# Allegro board JN5168-001-MXX-CarrierBoard.brd
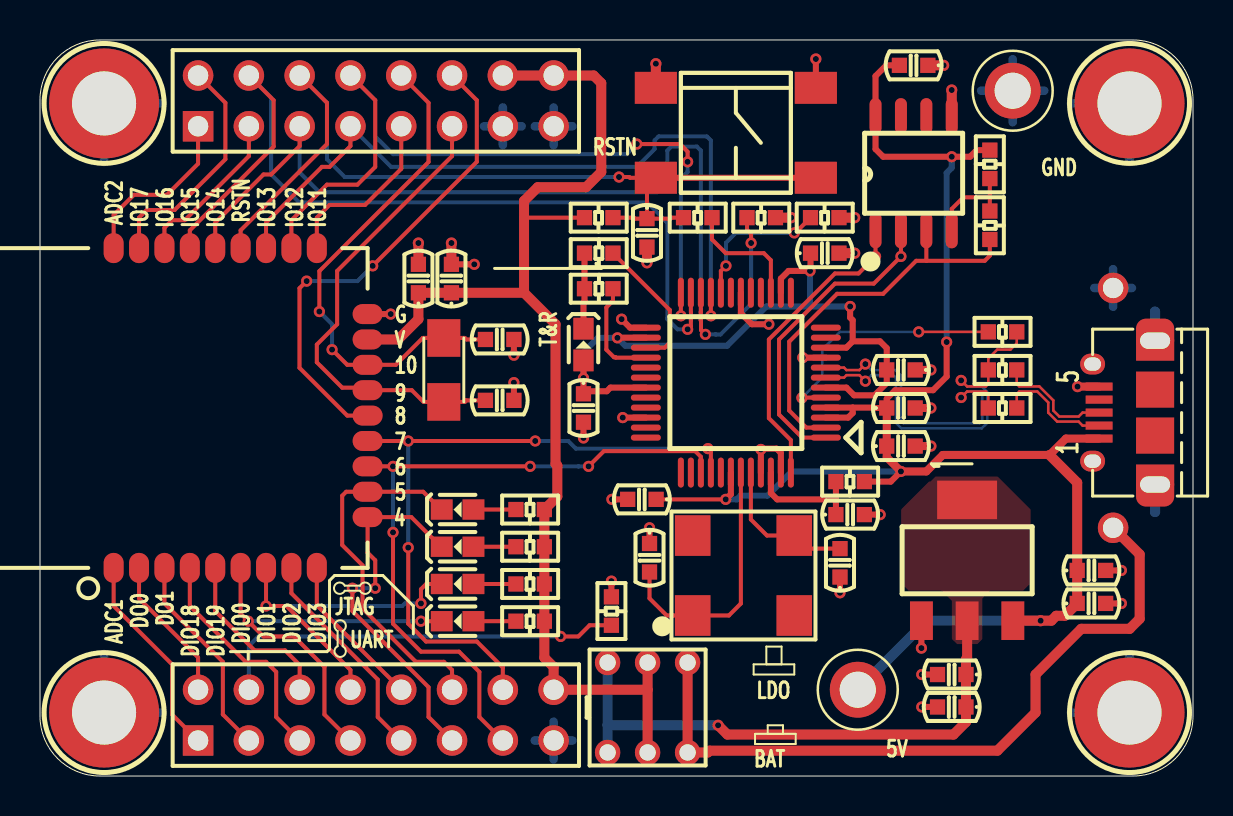
[diagram p0: board, top side]
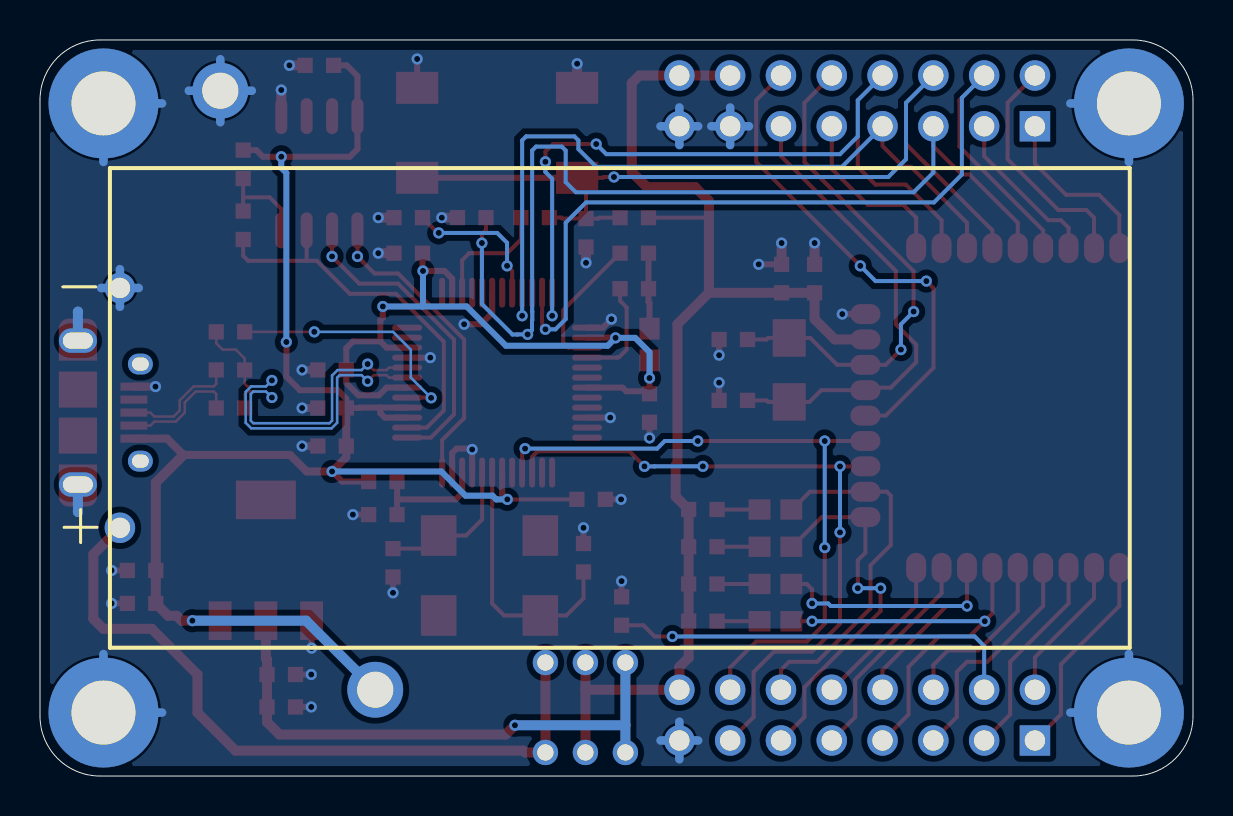
[diagram p1: board, bottom side, seen from below]

Outline 57.66 x 36.83 mm; copper layers: TOP, BOTTOM. Coordinates in mm from the lower left corner of the outline.
Outline path: 0,33.83 arc(0.88,35.95) 3,36.83 54.66,36.83 arc(56.78,35.95) 57.66,33.83 57.66,3 arc(56.78,0.88) 54.66,0 3,0 arc(0.88,0.88) 0,3 0,33.83

## Design rules (mm)
constraint set DEFAULT: min track width 0.127, pair gap 0.127
net group USB_DIFF1: nets N10452 N10456
net group USB_DIP: nets DM DP

## Placement (name value [footprint] x y rotation side)
C1  226  [C0603]  52.58 10.29 0 top
C2  226  [C0603]  43.05 18.41 0 top
C3  104  [C0603]  52.58 8.64 0 top
C4  226  [C0603]  45.59 5.08 180 top
C5  226  [C0603]  20.57 24.89 90 top
C6  104  [C0603]  45.59 3.46 180 top
C7  471  [C0603]  30.35 27.18 270 top
C8  104  [C0603]  27.18 18.41 270 top
C9  120  [C0603]  22.99 18.8 0 top
C10  104  [C0603]  43.05 16.51 0 top
C11  104  [C0603]  30.1 13.84 180 top
C12  104  [C0603]  39.24 26.16 0 top
C13  120  [C0603]  22.99 21.84 0 top
C14  104  [C0603]  43.05 20.32 180 top
C15  104  [C0603]  40.51 13.08 0 top
C16  104  [C0603]  43.69 35.56 180 top
C17  270  [C0603]  30.48 10.92 270 top
C18  270  [C0603]  40 10.67 90 top
C19  104  [C0603]  18.92 24.89 90 top
G1  32.768KHz  [OSC_SMD_3215]  20.19 20.32 270 top
G2  6MHz  [OSC_SMD_7050_4P]  35.18 10.03 90 top
H1  HOLE  [HOLE3R0]  3.21 33.66 0 top
H2  HOLE  [HOLE3R0]  3.21 3.18 0 top
H3  HOLE  [HOLE3R0]  54.48 33.66 0 top
H4  HOLE  [HOLE3R0]  54.48 3.18 0 top
J1  CON_2x8_2r54  [CON2X8_2R54_DIP]  16.79 3.05 90 top
J2  CON_2x8_2r54  [CON2X8_2R54_DIP]  16.79 33.78 90 top
J3  BAT  [BAT_AAAX2_51X24X12]  28.66 18.42 180 bottom
J4  -  [ZX62D_B_5P8]  53.09 18.19 90 top
NOREF  -  []  0 23.49 0 top
NOREF#2  -  []  55.76 14.58 90 top
NOREF#3  -  []  34.88 0 90 top
R1  103  [R0603]  24.51 7.75 180 top
R2  103  [R0603]  24.51 9.61 180 top
R3  103  [R0603]  24.51 11.47 180 top
R4  103  [R0603]  24.51 13.34 180 top
R5  270  [R0603]  48.13 18.41 180 top
R6  103  [R0603]  27.94 27.94 180 top
R7  270  [R0603]  48.13 20.32 180 top
R10  103  [R0603]  36.07 27.94 180 top
R11  103  [R0603]  39.24 27.94 180 top
R12  270  [R0603]  32.89 27.94 180 top
R13  471  [R0603]  40.51 14.73 180 top
R16  152  [R0603]  48.13 22.22 180 top
R17  222  [R0603]  47.5 27.56 270 top
R18  103  [R0603]  47.5 30.61 90 top
R19  103  [R0603]  27.94 24.38 0 top
R20  103  [R0603]  27.94 26.16 0 top
R21  103  [R0603]  28.57 8.25 270 top
SW1  RESET_SW  [B3FS_6X6X4R3]  34.8 32.19 0 top
SW2  5.8x5.8_DPDT  [DPDT_5R8X5R8]  30.38 3.43 270 top
TP1  GND  [TP_1R8]  48.64 34.29 0 top
TP2  GND  [TP_1R8]  40.89 4.32 0 top
U1  -  [JN5168-001-M00]  3.68 10.41 90 top
U2  AMS1117-3.3  [SOT223-2]  46.36 10.8 0 top
U3  FT2232D  [LQFP48_0R5_9X9]  34.8 19.69 90 top
U4  93C66A  [SO8N_6R0_1R27]  41.78 27.31 90 top
V1  RED  [V0603]  20.88 7.75 0 top
V2  RED  [V0603]  20.88 9.61 0 top
V3  RED  [V0603]  20.88 11.47 0 top
V4  RED  [V0603]  20.88 13.34 0 top
V5  RED  [V0603]  27.18 21.59 270 top

## Library data of the parts
C1-C13 C15 C19 = CAP_NP
C14 C16-C18 = CAP NP
G1 = G_OSC_2PIN
G2 = G_OSC_4PINpassive
H1-H4 = HOLE
J1 J2 = CON16AP_1
J3 = XS_CON2
J4 = Xs_MICRO_USB_0
R1-R7 R12 R21 = R2
R10 R11 R13 R16-R20 = R
SW1 = S_PUSHBUTTON-SPST-4PIN
SW2 = S_DPDT
TP1 TP2 = TP_TEST-POINT
U1 = D_JN5168-001-MXX
U2 = N_PWR_ADP3338AKC: User Part Number: UPN; Tolerance: TOL
U3 = FT2232D_1
U4 = 93C66_0
V1-V5 = V_LED

## Footprints (pads in the part's own frame, mm; a bottom-side part is the same pattern mirrored in y, then rotated)
B3FS_6X6X4R3
  rect 2.108x1.6 smd: 1(-4,-2.25) 2(4,-2.25) 3(-4,2.25) 4(4,2.25)
BAT_AAAX2_51X24X12
  round 1.524 hole 1.016: 1(-25,6) 2(-25,-6)
C0603
  rect 0.762x0.762 smd: 1(-0.711,0) 2(0.711,0)
CON2X8_2R54_DIP
  rect 1.524x1.524 hole 1.016: 1(-1.27,8.89)
  round 1.524 hole 1.016: 2(-1.27,6.35) 3(-1.27,3.81) 4(-1.27,1.27) 5(-1.27,-1.27) 6(-1.27,-3.81) 7(-1.27,-6.35) 8(-1.27,-8.89) 9(1.27,-8.89) 10(1.27,-6.35) 11(1.27,-3.81) 12(1.27,-1.27) 13(1.27,1.27) 14(1.27,3.81) 15(1.27,6.35) 16(1.27,8.89)
DPDT_5R8X5R8
  round 1.27 hole 0.813: 1(-2.25,2) 2(-2.25,0) 3(-2.25,-2) 4(2.25,-2) 5(2.25,0) 6(2.25,2)
HOLE3R0
  round 5.5 hole 3.2: 1(0,0)
JN5168-001-M00
  oval 1.5x1 smd: 1(0,0) 2(0,-1.27) 3(0,-2.54) 4(0,-3.81) 5(0,-5.08) 6(0,-6.35) 7(0,-7.62) 8(0,-8.89) 9(0,-10.16) 19(16,-10.16) 20(16,-8.89) 21(16,-7.62) 22(16,-6.35) 23(16,-5.08) 24(16,-3.81) 25(16,-2.54) 26(16,-1.27) 27(16,0)
  oval 1x1.5 smd: 10(2.54,-12.7) 11(3.81,-12.7) 12(5.08,-12.7) 13(6.35,-12.7) 14(7.62,-12.7) 15(8.89,-12.7) 16(10.16,-12.7) 17(11.43,-12.7) 18(12.7,-12.7)
LQFP48_0R5_9X9
  oval 0.3x1.5 smd: 1(-2.75,-4.5) 2(-2.25,-4.5) 3(-1.75,-4.5) 4(-1.25,-4.5) 5(-0.75,-4.5) 6(-0.25,-4.5) 7(0.25,-4.5) 8(0.75,-4.5) 9(1.25,-4.5) 10(1.75,-4.5) 11(2.25,-4.5) 12(2.75,-4.5) 25(2.75,4.5) 26(2.25,4.5) 27(1.75,4.5) 28(1.25,4.5) 29(0.75,4.5) 30(0.25,4.5) 31(-0.25,4.5) 32(-0.75,4.5) 33(-1.25,4.5) 34(-1.75,4.5) 35(-2.25,4.5) 36(-2.75,4.5)
  oval 1.5x0.3 smd: 13(4.5,-2.75) 14(4.5,-2.25) 15(4.5,-1.75) 16(4.5,-1.25) 17(4.5,-0.75) 18(4.5,-0.25) 19(4.5,0.25) 20(4.5,0.75) 21(4.5,1.25) 22(4.5,1.75) 23(4.5,2.25) 24(4.5,2.75) 37(-4.5,2.75) 38(-4.5,2.25) 39(-4.5,1.75) 40(-4.5,1.25) 41(-4.5,0.75) 42(-4.5,0.25) 43(-4.5,-0.25) 44(-4.5,-0.75) 45(-4.5,-1.25) 46(-4.5,-1.75) 47(-4.5,-2.25) 48(-4.5,-2.75)
OSC_SMD_3215
  rect 1.88x1.651 smd: 1(-1.6,0) 2(1.6,0)
OSC_SMD_7050_4P
  rect 2.032x1.778 smd: 1(-2,2.54) 2(-2,-2.54) 3(2,-2.54) 4(2,2.54)
R0603
  rect 0.762x0.762 smd: 1(-0.711,0) 2(0.711,0)
SO8N_6R0_1R27
  oval 1.8x0.6 smd: 1(0,0) 2(0,-1.27) 3(0,-2.54) 4(0,-3.81) 5(5.715,-3.81) 6(5.715,-2.54) 7(5.715,-1.27) 8(5.715,0)
SOT223-2
  rect 1.143x1.93 smd: 1(-2.286,-3.023) 2(0,-3.023) 3(2.286,-3.023)
  rect 2.997x1.93 smd: PAD(0,3.023)
TP_1R8
  round 2.794 hole 1.803: 1(0,0)
V0603
  rect 1.092x1.016 smd: 1(-0.794,0) 2(0.794,0)
ZX62D_B_5P8
  rect 0.406x1.346 smd: 1(-1.3,0.123) 2(-0.65,0.123) 3(0,0.123) 4(0.65,0.123) 5(1.3,0.123)
  oval 1.219x1.905 hole 0.813x1.499: 6(3.6,-2.677) 9(-3.6,-2.677)
  rect 1.803x1.905 smd: 7(1.15,-2.677) 8(-1.15,-2.677)
  oval 1.041x1.245 hole 0.66x0.838: 10(2.428,0.448) 11(-2.428,0.448)

## Nets
AVCC_5V: C15.1 R13.2 U3.46
GND: C1.2 C2.2 C3.2 C4.2 C5.2 C6.2 C7.2 C8.2 C9.2 C10.2 C11.2 C12.2 C13.2 C14.1 C15.2 C16.1 C17.1 C18.1 C19.2 H1.1 H2.1 H3.1 H4.1 J1.8 J2.7 J2.8 J3.1 J4.5 J4.6 J4.9 R10.1 R11.1 R21.1 SW1.3 SW1.4 TP1.1(TP) U1.18 U2.1 U3.9 U3.18 U3.25 U3.34 U3.45 U3.47 U4.5
VCC_3V3: C5.1 C19.1 J1.9 J2.9 J2.10 R1.1 R2.1 R3.1 R4.1 R6.2 SW2.2 SW2.5 U1.17
VCC_5V: C1.1 C2.1 C3.1 C10.1 C11.1 C16.2 J4.1(VBUS) R13.1 R18.2 TP2.1(TP) U2.3 U3.3 U3.4 U3.42 U4.8(VCC)
VCCIO_3V3: C8.1 C12.1 C14.2 U3.6 U3.10 U3.14 U3.26 U3.31 V5.2
ACBUS0: R12.1 U3.15
ADC1: J1.1 U1.1
ADC2: J2.1 U1.27(VREF/ADC2)
BAT_VCC: J3.2 SW2.1 SW2.6
DIO2: J1.5 U1.8
DIO3: J1.12 U1.9
DIO8: J2.11 U1.14
DIO9: C9.1 G1.2 J2.6 U1.15
DIO10: C13.1 G1.1 J2.12 U1.16
DIO11: J2.5 U1.19
DIO16: J2.2 U1.25
DIO17: J2.16 U1.26
DIO18: J1.3 U1.4
DIO19: J1.14 U1.5
DM: R5.2 U3.8
DO0: J1.16 U1.2
DO1: J1.2 U1.3
DP: R7.2 R16.1 U3.7
EECS: U3.48 U4.1
EEIO: R17.2 U3.2 U4.3
EESK: U3.1 U4.2
JTAG_TCK: J2.13 U1.20 U3.24
JTAG_TDI: J2.15 U1.24 U3.23
JTAG_TDO: J2.3 R10.2 U1.23 U3.22
JTAG_TMS: J2.4 U1.21 U3.21
LDO_3V3: C4.1 C6.1 SW2.3 SW2.4 U2.2 U2.PAD(OUT2)
LED1: J1.4 U1.6 V1.1
LED2: J1.13 U1.7 V2.1
LED3: J1.6 U1.10 V3.1
LED4: J1.11 U1.11 V4.1
RESETN: C7.1 J2.14 R6.1 R12.2 SW1.1 SW1.2 U1.22
RXD0: J1.10 U1.13 U3.40
TXD0: J1.7 U1.12 U3.39
N00555: R1.2 V1.2
N00717: R2.2 V2.2
N00810: R3.2 V3.2
N00904: R4.2 V4.2
N10452: J4.3 R7.1
N10456: J4.2 R5.1
N16704285: R11.2 U3.20
N16704295: R19.1 R20.1 V5.1
N16704491: C17.2 G2.1 U3.43
N16704511: C18.2 G2.3 U3.44(XTOUT)
N16704687: R16.2 U3.5
N16704769: R19.2 U3.28
N16704773: R20.2 U3.27
N16706568: R17.1 R18.1 U4.4
N16780926: J1.15 R21.2

Pads without a net: G2 2 4; J4 4 7 8 10 11; U3 11 12 13 16 17 19 29 30 32 33 35 36 37 38 41; U4 6 7

## Via types
v1: diameter 0.559, hole 0.305, TOP to BOTTOM, 81 vias

## Routing (per net, layer and track width the routed paths; a pad name or vN(x,y) marks a point on that pad's centre or on a via; arc(x,y) is an arc through that point)
AVCC_5V: length 6.1
  TOP w0.3: U3.46 36.55,14.16 36.86,13.84 39.7,13.84 39.8,13.74 ; 39.8,13.74 39.8,13.74 C15.1 ; 39.8,13.74 R13.2
GND: length 83.9
  TOP w0.3: C5.2 v1(21.72,25.6) ; C6.2 v1(44.09,3.46) ; U3.9 v1(38.14,20.93) ; C18.1 v1(40,9.17) ; v1(29.08,22.86) 29.51,22.44 U3.25 ; SW1.4 v1(38.8,35.88) ; C4.2 v1(44.09,5.08) ; U3.34 v1(29.14,17.93) ; C15.2 v1(42.01,13.08) ; C9.2 v1(23.7,19.69) ; C17.1 v1(30.48,12.42) ; C8.2 v1(27.18,16.92) ; U1.18 v1(17.54,23.12) ; U3.47 37.05,16.17 36.83,16.38 36.09,16.38 v1(36.05,16.34) U3.45 ; C3.2 v1(54.08,8.64) ; C13.2 v1(23.7,21.06) ; U3.18 35.05,23.16 35.6,22.61 v1(36.45,22.61) ; C11.2 v1(28.6,13.84) ; R21.1 v1(28.57,9.75) ; U2.1 v1(44.08,6.4) ; C1.2 v1(54.08,10.29)
  TOP w0.4: C2.2 v1(44.55,18.41) ; J4.5 v1(51.88,19.49) ; C10.2 v1(44.55,16.51) ; C14.1 v1(44.55,20.32)
  TOP w0.5: C16.1 v1(45.19,35.56) ; SW1.3 v1(30.8,35.64) ; C12.2 v1(40.74,26.16) ; U4.5 v1(45.59,34.33) ; C7.2 v1(30.35,25.68) ; C5.2 v1(20.57,26.67) ; R11.1 v1(40.74,27.94) ; R10.1 v1(37.57,27.94) ; C19.2 v1(18.92,26.67)
  BOTTOM w0.427: 25.69,0.84 J1.8 ; J1.8 26.62,1.78 ; J1.8 24.75,1.78 ; J1.8 25.69,2.72 ; TP1.1 50.22,34.29 ; TP1.1 48.64,35.87 ; TP1.1 47.07,34.29 ; TP1.1 48.64,32.72 ; J2.8 26.62,32.51 ; J2.8 24.75,32.51 ; J2.8 25.69,31.57 ; J2.8 25.69,33.45 ; J3.1 53.66,25.36 ; J3.1 54.6,24.42 ; J3.1 53.66,23.48 ; J3.1 52.72,24.42 ; 6.13,33.66 H1.1 3.21,30.73 ; 51.56,3.18 H4.1 54.48,6.1 ; 23.15,31.57 J2.7 ; J2.7 23.15,33.45 ; J2.7 22.21,32.51 ; J2.7 24.09,32.51 ; 54.48,30.73 H3.1 51.56,33.66 ; 6.13,3.18 H2.1 3.21,6.1
  BOTTOM w0.5: 55.75,13.21 55.76,13.22 J4.9 ; J4.6 55.76,23.23 55.75,23.24
VCC_3V3: length 61.4
  TOP w0.2: R6.2 24.21,27.94
  TOP w0.5: SW2.2 30.38,4.32 ; 30.38,4.32 SW2.5 ; 30.38,4.32 J1.9 25.69,5.46 25.22,5.92 R1.1 R2.1 R3.1 R4.1 25.87,13.98 25.87,15.53 25.78,15.62 25.78,22.61 24.21,24.18 ; 23.15,35.05 27.69,35.05 28.07,34.67 28.07,30.23 27.31,29.46 24.89,29.46 24.21,28.78 24.21,24.18 ; 24.21,24.18 C5.1 C19.1 18.92,22.86 17.91,21.84 U1.17
VCC_5V: length 83.4
  TOP w0.2: C11.1 v1(34.29,13.84)
  TOP w0.3: C16.2 42.32,35.56 41.78,35.02 U4.8 41.78,31.37 42.16,30.99 v1(45.59,30.99) 46.51,30.99 46.84,31.32 R18.2 ; 40.64,18.44 41.66,18.44 41.68,18.41 C2.1 42.34,18.88 42.76,19.3 44.66,19.3 45.34,19.99 v1(45.34,21.72) ; 40.64,18.44 40.64,18.16 40.41,17.93 U3.3 ; 40.64,18.44 U3.4 ; v1(34.29,13.84) 34.55,14.1 U3.42 ; v1(43.05,15.24) 42.54,14.73 41.22,14.73
  TOP w0.4: C2.1 C10.1 42.34,15.95 v1(43.05,15.24) 44.32,15.24 45.15,16.07 50.48,16.07 51.3,16.88 J4.1
  TOP w0.5: 50.48,16.07 51.87,14.68 C1.1 C3.1 51.25,8.02 50.82,8.02 50.57,7.77 v1(50.04,7.77) U2.3
  BOTTOM w0.3: v1(34.29,13.84) 34.85,13.84 35.03,14.03 36.38,14.03 37.59,15.24 v1(43.05,15.24) ; v1(45.59,30.99) 45.59,30.43 45.34,30.18 v1(45.34,21.72)
  BOTTOM w0.5: TP2.1 44.35,7.77 v1(50.04,7.77)
VCCIO_3V3: length 37.6
  TOP w0.3: U3.10 40.33,21.44 40.64,21.75 ; U3.26 28.89,21.93 v1(28.88,21.92) ; v1(40.51,23.5) 40.51,22.94 40.64,22.81 40.64,21.75 ; 40.64,21.75 42,21.75 42.34,21.41 C14.2 42.34,19.66 41.73,19.05 40.71,19.05 40.33,19.44 U3.6 ; V5.2 v1(27.18,19.91) C8.1 27.31,19.25 28.34,19.25 28.53,19.44 U3.31 ; C12.1 38.53,25.3 v1(38.51,25.27) 37.43,25.27 37.05,24.89 U3.14
  BOTTOM w0.3: v1(38.51,25.27) 38.51,23.53 38.54,23.5 ; 38.54,23.5 v1(40.51,23.5) ; 38.54,23.5 36.32,23.5 34.36,21.53 29.27,21.53 v1(28.88,21.92) 27.89,21.92 27.18,21.21 v1(27.18,19.91)
ACBUS0: length 6.1
  TOP w0.2: R12.1 33.6,26.85 34.29,26.16 36.19,26.16 36.55,25.81 U3.15
ADC1: length 10.4
  TOP w0.2: J1.1 6.6,3.08 6.6,5.59 3.68,8.51 U1.1
ADC2: length 8.8
  TOP w0.2: U1.27 3.68,28.07 4.7,29.08 6.35,29.08 7.91,30.64 J2.1
BAT_VCC: length 36.1
  TOP w0.5: J3.2 54.99,11.09 54.99,7.87 54.49,7.37 52.07,7.37 49.78,5.08 49.78,3.18 47.88,1.27 33.49,1.27 33.4,1.18 SW2.6 SW2.1
DIO2: length 10.9
  TOP w0.2: U1.8 12.57,9.14 16.89,4.83 16.89,2.95 J1.5
DIO3: length 7.8
  TOP w0.2: J1.12 13.84,8.54 U1.9
DIO8: length 24.7
  TOP w0.2: 20.6,35.05 21.84,33.81 21.84,30.73 v1(16.64,25.53) ; v1(13.34,24.77) 12.98,24.41 12.98,20.42 15.37,18.03 U1.14
  BOTTOM w0.2: v1(16.64,25.53) 15.88,24.77 v1(13.34,24.77)
DIO9: length 23.9
  TOP w0.2: C9.1 21.32,18.8 21.25,18.72 G1.2 19.18,18.72 18.59,19.31 U1.15 16.26,19.43 15.11,19.43 13.84,20.7 13.84,21.59 14.86,22.61 14.86,25.27 20.6,31.02 J2.6
DIO10: length 25.4
  TOP w0.2: 18.06,35.05 19.43,33.69 19.43,30.72 13.97,25.26 v1(13.97,23.24) ; v1(14.6,21.34) 15.37,20.57 U1.16 17.8,20.57 19.14,21.92 G1.1 21.25,21.92 21.32,21.84 C13.1
  BOTTOM w0.2: v1(13.97,23.24) 14.6,22.61 v1(14.6,21.34)
DIO11: length 8.9
  TOP w0.2: U1.19 13.84,27.94 14.48,28.57 16.26,28.57 18.06,30.38 J2.5
DIO16: length 8.2
  TOP w0.2: J2.2 10.44,31.02 7.24,27.81 6.6,27.81 6.22,27.43 U1.25
DIO17: length 11.8
  TOP w0.2: 7.91,35.05 9.27,33.69 9.27,30.86 6.73,28.32 5.33,28.32 4.95,27.94 U1.26
DIO18: length 11.5
  TOP w0.2: J1.3 11.81,2.95 11.81,5.21 11.3,5.72 10.29,5.72 7.49,8.51 U1.4
DIO19: length 8.7
  TOP w0.2: J1.14 12.99,5.56 12.26,6.29 10.73,6.29 8.76,8.25 U1.5
DM: length 15.4
  TOP w0.127: v1(46.06,18.94) 46.36,19.24 47.29,19.24 47.42,19.11 R5.2 ; U3.8 40.21,20.44 40.33,20.31 40.97,20.31 v1(41.28,20.61)
  BOTTOM w0.127: v1(41.28,20.61) 41.58,20.31 42.78,20.31 43.05,20.04 43.05,17.78 43.18,17.65 46.99,17.65 47.12,17.78 47.12,19.11 46.99,19.24 46.36,19.24 v1(46.06,18.94)
DO0: length 7.3
  TOP w0.2: U1.2 4.95,8.89 7.91,5.94 J1.16
DO1: length 10.4
  TOP w0.2: U1.3 6.22,8.64 9.14,5.72 9.14,3.08 J1.2
DP: length 19.1
  TOP w0.127: U3.7 40.21,19.93 40.33,20.06 40.97,20.06 v1(41.28,19.76) ; v1(46.06,19.8) 46.36,19.49 47.29,19.49 47.42,19.62 R7.2 47.42,20.89 47.87,21.34 48.53,21.34 48.84,21.65 48.84,22.22
  BOTTOM w0.127: v1(41.28,19.76) 41.58,20.06 42.67,20.06 42.8,19.93 42.8,17.67 43.07,17.4 47.1,17.4 47.37,17.67 47.37,19.22 47.1,19.49 46.36,19.49 v1(46.06,19.8)
EECS: length 15.5
  TOP w0.2: U4.1 v1(41.78,26) 40.93,25.15 39.75,25.15 36.45,21.84 36.45,17.91 37.55,16.81 U3.48
EEIO: length 19.8
  TOP w0.2: 44.32,25.78 U4.3 ; 44.32,25.78 47.24,25.78 47.5,26.03 R17.2 ; 44.32,25.78 43.81,25.78 42.16,24.13 39.86,24.13 37.47,21.74 37.47,18.29 38.32,17.44 U3.2
EESK: length 15.7
  TOP w0.2: U3.1 38.11,16.93 36.96,18.09 36.96,21.84 39.75,24.64 41.69,24.64 v1(43.05,26) U4.2
JTAG_TCK: length 41.2
  TOP w0.2: 15.53,35.05 16.76,33.81 16.76,30.48 15.88,29.59 14.35,29.59 12.57,27.81 U1.20 ; v1(32.38,30.73) 32.38,31.24 32,31.62 v1(29.84,31.62) ; U3.24 v1(32.05,23.03)
  BOTTOM w0.2: v1(29.84,31.62) 29.34,31.12 17.65,31.12 16.76,32 16.76,33.81 15.53,35.05 ; v1(32.38,30.73) 32.38,30.23 32.05,29.89 v1(32.05,23.03)
JTAG_TDI: length 45.1
  TOP w0.2: U3.23 32.55,23.21 32.55,23.2 32.55,22.82 32.55,22.81 32.55,22.52 v1(32.38,22.35) ; U1.24 7.49,27.31 11.68,31.5 11.68,33.81 10.44,35.05
  BOTTOM w0.2: v1(32.38,22.35) 31.88,22.35 31.37,22.86 31.37,27.69 30.35,28.7 12.95,28.7 11.56,30.1 11.56,33.94 10.44,35.05
JTAG_TDO: length 51.6
  TOP w0.2: R10.2 35.36,27.33 35.56,27.13 v1(35.56,26.67) ; J2.3 12.99,31.52 11.56,30.1 11.18,30.1 8.76,27.69 U1.23 ; v1(33.27,22.1) 33.05,22.32 33.05,22.77 33.05,22.78 33.05,22.81 33.04,22.82 33.04,23.2 33.05,23.21 U3.22
  BOTTOM w0.2: J2.3 12.99,30.19 13.97,29.21 30.86,29.21 31.37,29.72 31.37,31.3 31.57,31.5 32.85,31.5 33.05,31.3 33.05,23.24 33.04,23.24 33.04,22.82 33.05,22.81 33.05,22.32 v1(33.27,22.1) 33.78,22.1 33.79,22.09 34.03,22.09 35.56,23.62 v1(35.56,26.67)
JTAG_TMS: length 37.8
  TOP w0.2: U1.21 11.3,27.69 14.1,30.48 14.48,30.48 15.53,31.52 J2.4 ; U3.21 v1(33.55,23.03)
  BOTTOM w0.2: v1(33.55,23.03) 33.55,31.8 33.35,32 30.93,32 30.73,31.8 30.73,31.37 29.84,30.48 17.56,30.48 J2.4
LDO_3V3: length 28
  TOP w0.5: U2.2 46.36,5.9 46.3,5.84 C4.1 C6.1 46.3,2.7 45.68,2.08 34.37,2.08 v1(33.91,2.54)
  BOTTOM w0.5: SW2.3 28.38,2.54 ; 28.38,2.54 SW2.4 ; 28.38,2.54 v1(33.91,2.54)
LED1: length 21.5
  TOP w0.2: U1.6 10.03,8.13 v1(10.41,7.75) 11.18,6.99 12.7,6.99 14.22,5.46 14.22,3.08 J1.4 ; V1.1 v1(19.05,7.75)
  BOTTOM w0.2: v1(19.05,7.75) v1(10.41,7.75)
LED2: length 18.1
  TOP w0.2: J1.13 15.53,5.31 12.32,8.51 v1(11.3,8.51) U1.7 ; v1(19.05,8.64) 19.05,9.34 19.32,9.61 V2.1
  BOTTOM w0.2: v1(11.3,8.51) 18.12,8.51 18.25,8.64 v1(19.05,8.64)
LED3: length 18.9
  TOP w0.2: v1(15.62,9.4) 15.62,8.25 19.43,4.44 19.43,2.95 J1.6 ; V3.1 20.05,11.47 18.57,12.96 U1.10 16.38,11.18 16.76,10.8 v1(16.76,9.4)
  BOTTOM w0.2: v1(16.76,9.4) v1(15.62,9.4)
LED4: length 18.2
  TOP w0.2: V4.1 20.05,13.34 19.16,14.22 U1.11 15.31,14.22 15.11,14.03 15.11,11.56 16.13,10.54 16.13,8.38 18.8,5.72 20.2,5.72 20.6,5.31 J1.11
RESETN: length 46.4
  TOP w0.2: v1(28.96,29.97) 29.46,29.97 29.5,29.94 SW1.1 30.35,29.49 C7.1 ; C7.1 31.52,27.89 31.57,27.94 R12.2 ; C7.1 29.75,27.89 29.69,27.94 R6.1 ; 12.99,35.05 14.35,33.69 14.35,31.62 10.03,27.31 U1.22
  TOP w0.3: SW1.1 SW1.2
  BOTTOM w0.2: 12.99,35.05 14.35,33.69 14.35,30.86 15.24,29.97 v1(28.96,29.97)
RXD0: length 34.3
  TOP w0.2: v1(33.4,16.38) 33.55,16.24 U3.40 ; v1(18.41,11.43) 18.41,7.62 19.3,6.73 21.84,6.73 23.15,5.43 J1.10 ; U1.13 16.38,16.76 v1(18.41,16.76) v1(24.77,16.76)
  BOTTOM w0.2: v1(24.77,16.76) 26.42,16.76 26.8,16.38 v1(33.4,16.38) ; v1(18.41,11.43) v1(18.41,16.76)
TXD0: length 35
  TOP w0.2: v1(27.43,15.49) 28.19,16.26 32.77,16.26 33.05,15.97 U3.39 ; U1.12 v1(17.65,15.5) v1(24.51,15.5) ; v1(17.65,12.19) 17.65,7.62 19.05,6.22 20.96,6.22 21.97,5.21 21.97,2.95 J1.7
  BOTTOM w0.2: v1(24.51,15.5) 26.92,15.5 v1(27.43,15.49) ; v1(17.65,15.5) v1(17.65,12.19)
N00555: length 2.1
  TOP w0.2: V1.2 R1.2
N00717: length 2.1
  TOP w0.2: V2.2 R2.2
N00810: length 2.1
  TOP w0.2: V3.2 R3.2
N00904: length 2.1
  TOP w0.2: V4.2 R4.2
N10452: length 5.9
  TOP w0.127: J4.3 52.14,18.19 51.94,17.99 50.97,17.99 50.67,18.29 50.67,18.8 49.97,19.49 48.97,19.49 48.84,19.62 48.84,20.32
N10456: length 5.9
  TOP w0.127: 48.84,18.41 48.84,19.11 48.97,19.24 49.87,19.24 50.42,18.69 50.42,18.18 50.87,17.73 51.94,17.73 52.14,17.53 J4.2
N16704285: length 7.4
  TOP w0.2: R11.2 37.77,27.18 v1(37.72,27.18) ; v1(34.3,25.53) 34.05,25.27 U3.20
  BOTTOM w0.2: v1(34.3,25.53) 34.3,26.68 34.8,27.18 v1(37.72,27.18)
N16704295: length 3.8
  TOP w0.3: V5.1 27.18,23.68 27.23,23.73 R19.1 R20.1
N16704491: length 13
  TOP w0.2: U3.43 35.05,8.63 34.45,8.03 G2.1 31.34,8.03 30.48,8.89 C17.2
N16704511: length 7.4
  TOP w0.2: C18.2 38.37,11.38 G2.3 36.35,12.03 35.55,12.84 U3.44
N16704687: length 12.7
  TOP w0.127: R16.2 v1(43.94,22.22)
  TOP w0.2: v1(38.1,18.92) 38.11,18.93 U3.5
  BOTTOM w0.127: v1(43.94,22.22) 40,22.22 39.12,21.34 39.12,19.94 v1(38.1,18.92)
N16704769: length 5.3
  TOP w0.2: U3.28 28.8,20.93 28.78,20.96 28.7,20.96 28.32,21.34 28.32,23.45 28.65,23.78 R19.2
N16704773: length 7
  TOP w0.2: R20.2 31.5,23.32 31.5,21.69 31.24,21.44 U3.27
N16706568: length 4.8
  TOP w0.2: 47.5,28.96 46.17,28.96 45.59,28.38 U4.4 ; 47.5,28.96 R17.1 ; 47.5,28.96 R18.1
N16780926: length 20.7
  TOP w0.2: R21.2 27.48,7.54 26.92,6.99 v1(26.03,6.99)
  BOTTOM w0.2: v1(26.03,6.99) 10.92,6.99 10.44,6.51 J1.15

## Copper pours and planes (outline as drawn; the poured copper is in the pictures)
GND on BOTTOM: 3,0.5 1.23,1.23 0.5,3 0.5,33.83 1.23,35.6 3,36.33 54.66,36.33 56.43,35.6 57.16,33.83 57.16,3 56.43,1.23 54.66,0.5
LDO_3V3 on TOP: 47.89,14.99 44.71,14.99 43.06,13.34 43.06,9.65 43.44,9.27 45.09,9.27 45.6,8.76 45.6,6.86 45.85,6.6 46.87,6.6 47.12,6.86 47.12,8.89 47.51,9.27 49.16,9.27 49.54,9.65 49.54,13.34
GND on TOP (solid shape): 56.21,22.88 56.57,22.74 56.72,22.38 56.72,20.78 54.81,20.78 54.81,22.38 54.96,22.74 55.31,22.88
GND on TOP (solid shape): 56.72,13.99 56.57,13.63 56.21,13.49 55.31,13.49 54.96,13.63 54.81,13.99 54.81,15.59 56.72,15.59

## Text on the board
Ref Des/Silkscreen Top: JTAG | UART | 4 | G | V | 10 | 9 | 8 | 7 | 6 | 5 | RSTN | BAT | LDO | 5V | GND | ADC2 | ADC1 | IO17 | DO0 | IO16 | DO1 | IO15 | DIO18 | IO14 | DIO19 | DIO0 | IO13 | DIO1 | DIO2 | IO12 | IO11 | DIO3 | T&R
DISPLAY_TOP: FIGURE | FINISHED_SIZE | 0.8382x0.6604 | 1.4986x0.8128 | SLOT HOLES: TOP to BOTTOM | ALL UNITS ARE IN MILLIMETERS | TOLERANCE_TRAVEL | +0.0762/-0.0762 | PLATED | QTY | 2 | 4 | TOTAL HOLES:
DIMENSION: FIGURE | FINISHED_SIZE | 0.3048 | 0.8128 | 1.016 | 1.8034 | 3.2 | DRILL CHART: TOP to BOTTOM | ALL UNITS ARE IN MILLIMETERS | TOLERANCE_TRAVEL | - | PLATED | QTY | 81 | 6 | 34 | 2 | 4 | 127 | TOTAL HOLES:
